# Altium PCB LED_driver.PcbDoc
Units mm, origin at the board's own origin, x right, y up, seen from the top; angles counter-clockwise.
Board outline 152.4 x 101.6 mm, 2 copper layers (Top Layer, Bottom Layer); 22 components, 17 nets, 55 pads, 10 vias.
Unrouted connection lines stored in the file: 1.
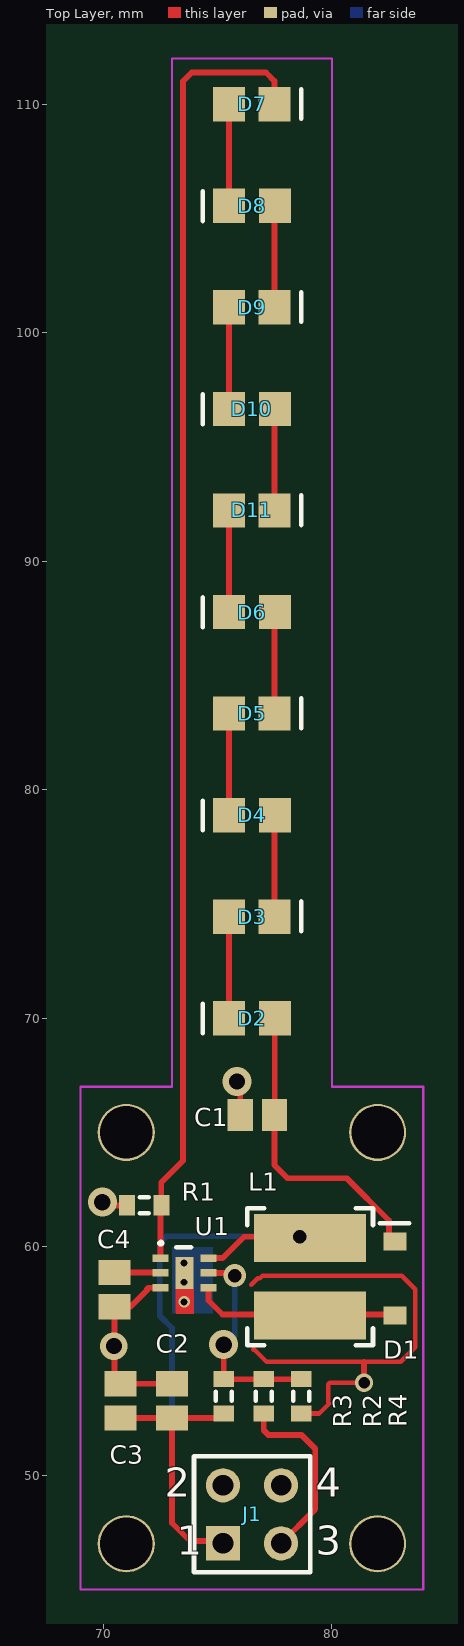
[diagram p0: Top Layer view]
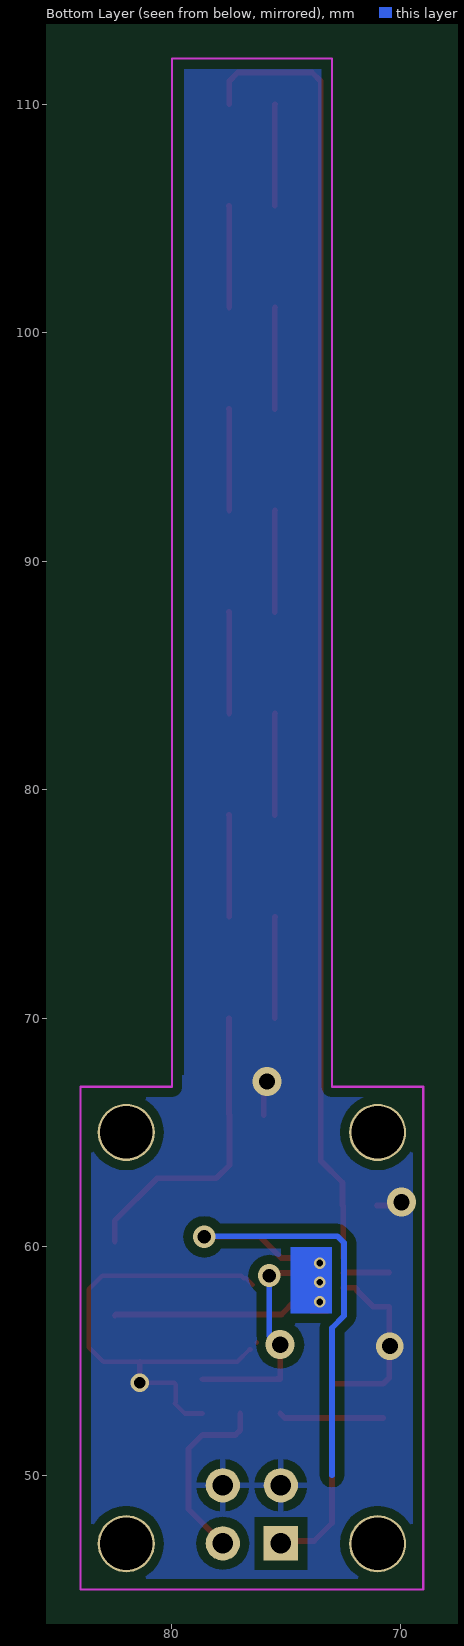
[diagram p1: Bottom Layer view, seen from below]

## Layer stack, top to bottom
Top Layer: signal copper 0.0356
Dielectric: dielectric 0.32, FR-4, Dk 4.8
Bottom Layer: signal copper 0.0356

## Board outline
25.4,25.4 177.8,25.4 177.8,127 25.4,127

## Design rules (kind name [scope] priority, off if disabled: settings)
Clearance Clearance_1 [All] p1 off: gap=0.4
Clearance [All] p2: gap=0.2
PolygonConnect [All] p1: connectstyle=Relief reliefconductorwidth=0.254 reliefentries=4 polygonreliefangle="90 Angle"
RoutingVias [All] p1: holewidth=0.711 width=1.27 viastyle="Through Hole" minholewidth=0.711 minwidth=1.27 maxholewidth=0.711 maxwidth=1.27
SilkscreenOverComponentPads [All] p1: minsilkscreentomaskgap=0.254
SolderMaskExpansion [All] p1: expansion=0.102
Width [All] p1: maxlimit=1 minlimit=0.2 preferedwidth=0.254 minimp=50.000000 maximp=50.000000 favimp=50.000000
27 further rules are at their usual default settings.

## Components (designator, comment, footprint, x,y, rotation, side; value= is the part's Value field where it differs from the comment)
C1 "Cap Semi" C0805 76.736,65.768 r180 top
C2 "Cap Semi" C0805 73,53.25 r270 top
C3 "Cap Semi" C0805 70.75,53.25 r270 top
C4 "Cap Semi" C0805 70.488,58.123 r90 top
D1 "MBR0530" SOD_123 82.756,58.605 r90 top
D2 "LED2" LED_0805 76.5,70 r180 top
D3 "LED2" LED_0805 76.491,74.444 r0 top
D4 "LED2" LED_0805 76.5,78.889 r180 top
D5 "LED2" LED_0805 76.491,83.333 r0 top
D6 "LED2" LED_0805 76.5,87.778 r180 top
D7 "LED2" LED_0805 76.491,110 r0 top
D8 "LED2" LED_0805 76.5,105.556 r180 top
D9 "LED2" LED_0805 76.491,101.111 r0 top
D10 "LED2" LED_0805 76.5,96.667 r180 top
D11 "LED2" LED_0805 76.491,92.222 r0 top
J1 "Header 4H" HDR2X2 75.235,47.015 r0 top
L1 "Inductor" 5020 79.047,58.681 r270 top
R1 "Res3" J1-0603 71.783,61.806 r0 top
R2 "Res3" J1-0603 77.015,53.45 r270 top
R3 "Res3" J1-0603 75.263,53.45 r270 top
R4 "Res3" J1-0603 78.664,53.45 r270 top
U1 "TPS61161" SON6 72.5,59.5 r0 top

## Footprints (in the part's own frame and the unit in brackets; to place one, negate y for a bottom-side part, rotate by r counter-clockwise, add the part's x,y. Pads: shape width x height; smd on the part's side, far side on the other; paste and mask are expansions set on the pad)
5020 [mm]
  rect 2.1x4.9 smd: 1(-1.7,0) 2(1.7,0)
  silkscreen extent -3,-2.75 3,2.75, body extent -2.67,-2.29 2.67,2.29, height 1.2
C0805 [mm] "Chip Capacitor, Body 2.0x1.3mm, IPC High Density"
  rect 1.1x1.4 smd: 1(-0.75,0) 2(0.75,0)
  body extent -1.1,-0.72 1.1,0.72, height 1.4
HDR2X2 [mm] "Connector; Header; 2x2 Position"
  rect 1.5x1.5 hole 0.9: 1(0,0)
  round 1.5 hole 0.9: 2(0,2.54) 3(2.54,0) 4(2.54,2.54)
  silkscreen extent -1.27,-1.27 3.81,3.81
J1-0603 [mm] "Chip Resistor, Body 1.6x0.8mm, IPC High Density"
  rect 0.7x0.9 smd: 1(-0.75,0) 2(0.75,0)
  silkscreen extent -0.2,-0.35 0.2,0.35, body extent -0.85,-0.48 0.85,0.48, height 0.9
LED_0805 [mm]
  rect 1.4x1.5 smd: 1(-1,0) 2(1,0)
  silkscreen extent 2.16,-0.63 2.16,0.67, body extent -1.07,-0.7 1.07,0.7, height 0.7
SOD_123 [mm]
  rect 0.8x1 smd: 1(-1.62,0) 2(1.62,0)
  silkscreen extent 2.41,-0.63 2.41,0.67, body extent -1.78,-0.76 1.78,0.76, height 1.2
SON6 [mm]
  rect 0.8x1.4 smd: 0(1.05,-0.65)
  rect 0.7x0.33 smd: 1(0,0) 2(0,-0.65) 3(0,-1.3) 4(2.1,-1.3) 5(2.1,-0.65) 6(2.1,0)
  silkscreen extent 0,0.48 1.34,0.66

## Part data
C1 C2 C3 C4: "Capacitor (Semiconductor SIM Model)"
D1: library part "D Schottky", "Schottky Diode"
D2 D3 D4 D5 D6 D7 D8 D9 D10 D11: "Typical RED, GREEN, YELLOW, AMBER GaAs LED"
J1: "Header, 4-Pin, Right Angle"
R1 R2 R3 R4: "Resistor"

## Free pads (board coordinates)
  round 2.5 hole 2.3: 0(71,47) 1(82,47) 2(71,65) 3(82,65)

## Via types
v1: diameter 1.27, hole 0.711, Top Layer to Bottom Layer, 3 vias
v2: diameter 0.5, hole 0.3, Top Layer to Bottom Layer, 3 vias
v3: diameter 1, hole 0.6, Top Layer to Bottom Layer, 2 vias
v4: diameter 0.8, hole 0.5, Top Layer to Bottom Layer, 1 vias
v5: diameter 1.2, hole 0.711, Top Layer to Bottom Layer, 1 vias

## Nets (pads, with @x,y where several pads share a name; then routed paths per layer and width w, separated by ;. In a path a pad name is that pad's centre, name@x,y a point inside that pad or via, vN(x,y) a via of type N, cw(c..) or ccw(c..) an arc to the next point about the centre after c; other vN are vias at no path point)
GND: C1.2 C2.1 C3.1 C4.1 J1.2 J1.4 R1.1 R4.2 U1.3 | length 33.1
  Top Layer w0.2: 76.476,58.331 76.759,58.614 76.851,58.614 76.962,58.725 83.058,58.725 83.642,58.141 83.642,55.601 83.007,54.966 81.407,54.966 77.139,54.966 76.605,55.499 76.555,55.499 ; R4.2 79.446,52.7 79.883,53.137 79.832,53.188 79.832,53.975 79.908,54.051 v4(81.407,54.051)
  Top Layer w0.254: v1@70.18,61.798 70.18,61.773 70.213,61.806 R1.1 ; U1.3 71.967,58.2 71.907,58.141 71.907,58.09 71.19,57.373 C4.1 70.488,54.262 C3.1 C2.1 ; v1(75.844,67.234) 75.844,67.285 75.986,67.143 C1.2 ; v4(81.407,54.051) 81.407,54.966
  other v1: 69.952,61.951
  other v5: 70.46,55.651
NetC1_1: C1.1 D1.2 D2.1 | length 13.4
  Top Layer w0.254: D2.1 77.5,65.782 C1.1 77.486,63.57 78.057,62.999 80.648,62.999 82.502,61.145 D1.2@82.502,60.225
NetC4_2: C4.2 U1.2 | length 2
  Top Layer w0.254: C4.2 72.477,58.873 U1.2
NetD1_1: D1.1 L1.2 U1.4 | length 8.7
  Top Layer w0.254: U1.4 74.6,57.642 75.21,57.032 82.455,57.032 D1.1@82.502,56.985
NetD2_2: D2.2 D3.1 | length 4.4
  Top Layer w0.254: D3.1 75.5,74.435 D2.2
NetD3_2: D3.2 D4.1 | length 4.4
  Top Layer w0.254: D3.2 77.491,78.88 D4.1
NetD4_2: D4.2 D5.1 | length 4.4
  Top Layer w0.254: D5.1 75.5,83.324 D4.2
NetD5_2: D5.2 D6.1 | length 4.4
  Top Layer w0.254: D5.2 77.491,87.769 D6.1
NetD6_2: D6.2 D11.1 | length 4.4
  Top Layer w0.254: D11.1 75.5,92.213 D6.2
NetD7_1: D7.1 D8.2 | length 4.4
  Top Layer w0.254: D7.1 75.5,109.991 D8.2
NetD7_2: D7.2 R1.2 U1.1 | length 57.2
  Top Layer w0.254: U1.1 72.5,61.773 R1.2 72.533,62.81 73.485,63.761 73.485,111.005 73.866,111.386 77.117,111.386 77.491,111.012 D7.2
NetD8_1: D8.1 D9.2 | length 4.4
  Top Layer w0.254: D9.2 77.491,105.547 D8.1
NetD9_1: D9.1 D10.2 | length 4.4
  Top Layer w0.254: D9.1 75.5,101.102 D10.2
NetD10_1: D10.1 D11.2 | length 4.4
  Top Layer w0.254: D11.2 77.491,96.658 D10.1
NetJ1_3: J1.3 R2.2 | length 8.1
  Top Layer w0.254: R2.2 77.015,51.966 77.216,51.765 78.664,51.765 79.273,51.156 79.273,48.514 J1.3
NetR2_1: R2.1 R3.1 R4.1 U1.5 | length 9.3
  Top Layer w0.254: U1.5 75.45,58.85 v3@75.491,58.808 ; v1(75.263,55.71) R3.1 ; R3.1@75.331,54.268 R3.1 ; R4.1 R2.1 R3.1
  Bottom Layer w0.254: v1(75.263,55.71) 75.288,55.684 75.288,55.633 75.745,56.091 v3(75.745,58.732)
VIN: C2.2 C3.2 J1.1 L1.1 R3.2 U1.6 | length 32.8
  Top Layer w0.254: C3.2 C2.2 ; U1.6 75.218,59.5 76.15,60.432 v3(78.59,60.432) ; J1.1 75.133,47.117 73.787,47.117 73,47.904 73,50 C2.2 ; R3.2 75.063,52.5 C2.2
  Bottom Layer w0.254: 73,50 73,56.446 72.469,56.977 72.469,60.17 72.466,60.173 72.753,60.459 78.563,60.459 v3(78.59,60.432)
pads on no net: U1.0
copper on no net: | length 0
  other v2: 73.533,57.582 73.533,58.445 73.533,59.284

## Polygon pours and split planes (outlines as drawn)
GND on Bottom Layer "Top Layer-No Net" (solid, remove dead copper, pour order 2): 68.463,45 84.463,45 84.463,67.5 79.463,67.5 79.463,112.5 71.963,112.5 71.963,67.5 69.463,67.5 66.963,67.5 66.963,45

## Keep-outs
Keep-Out Layer:
  lines w0.1: 69,45 84,45 84,67 80,67 80,112 73,112 73,67 69,67 69,45

## Other copper
Top Layer:
  rectangle: 73.152,57.048 73.965,58.166
Bottom Layer:
  rectangle: 73,57.074 74.803,59.995

## Silkscreen, mask and mechanical layers (free items; w line width, h text height)
Mechanical 1:
  lines w0.1: 73,67 73,108 ; 73,67 69,67 69,51 69,47 69,45 84,45 84,51 84,67 80,67 80,108 80,112 73,112 73,108 ; 73,67 73,108
  lines w0.254: 66.46,75 69,75 ; 67.476,74.492 69,75 ; 67.476,75.508 69,75 ; 69,41.746 69,42.254 ; 69,74.746 69,75.254 ; 70.46,116.746 73,116.746 ; 70.524,41.492 69,42 ; 70.524,42.508 69,42 ; 71.476,116.238 73,116.746 ; 71.476,117.254 73,116.746 ; 71.523,42 69,42 ; 73,74.746 73,75.254 ; 73,116.492 73,117 ; 74.524,74.492 73,75 ; 74.524,75.508 73,75 ; 75.54,75 73,75 ; 77.46,75 80,75 ; 78.476,74.492 80,75 ; 78.476,75.508 80,75 ; 80,74.746 80,75.254 ; 80,116.492 80,117 ; 81.477,42 84,42 ; 81.524,116.238 80,116.746 ; 81.524,117.254 80,116.746 ; 82.476,41.492 84,42 ; 82.476,42.508 84,42 ; 82.54,116.746 80,116.746 ; 84,41.746 84,42.254 ; 84,74.746 84,75.254 ; 85.524,74.492 84,75 ; 85.524,75.508 84,75 ; 86.54,75 84,75
  text "7 (mm)" at 72.412,113.089 h1.52
  text "4 (mm)" at 66.912,71.343 h1.52
  text "4 (mm)" at 77.912,71.343 h1.52
  text "15 (mm)" at 71.777,41.086 h1.52

## Dimensions
88,67 to 85,112 on Mechanical 1
90,67 to 86,45 on Mechanical 1
66,47 to 66,45 on Mechanical 1
69,40 to 71,40 on Mechanical 1
65,67 to 64,65 on Mechanical 1

## Text inside footprints (layer, text, board x,y; h text height)
J1: Top Overlay "3" at 79.299,46.507 h1.27; Top Overlay "4" at 79.299,49.047 h1.27; Top Overlay "2" at 72.695,49.047 h1.27; Top Overlay "1" at 73.203,46.507 h1.27